# Altium PCB Liq_Power.PcbDoc
Units mil, origin at the board's own origin, x right, y up, seen from the top; angles counter-clockwise.
Board outline 1500 x 3000 mil, 4 copper layers (Top Layer, GND, PWR, Bottom Layer), stack 62.447 mil thick; 28 components, 17 nets, 113 pads, 43 vias.
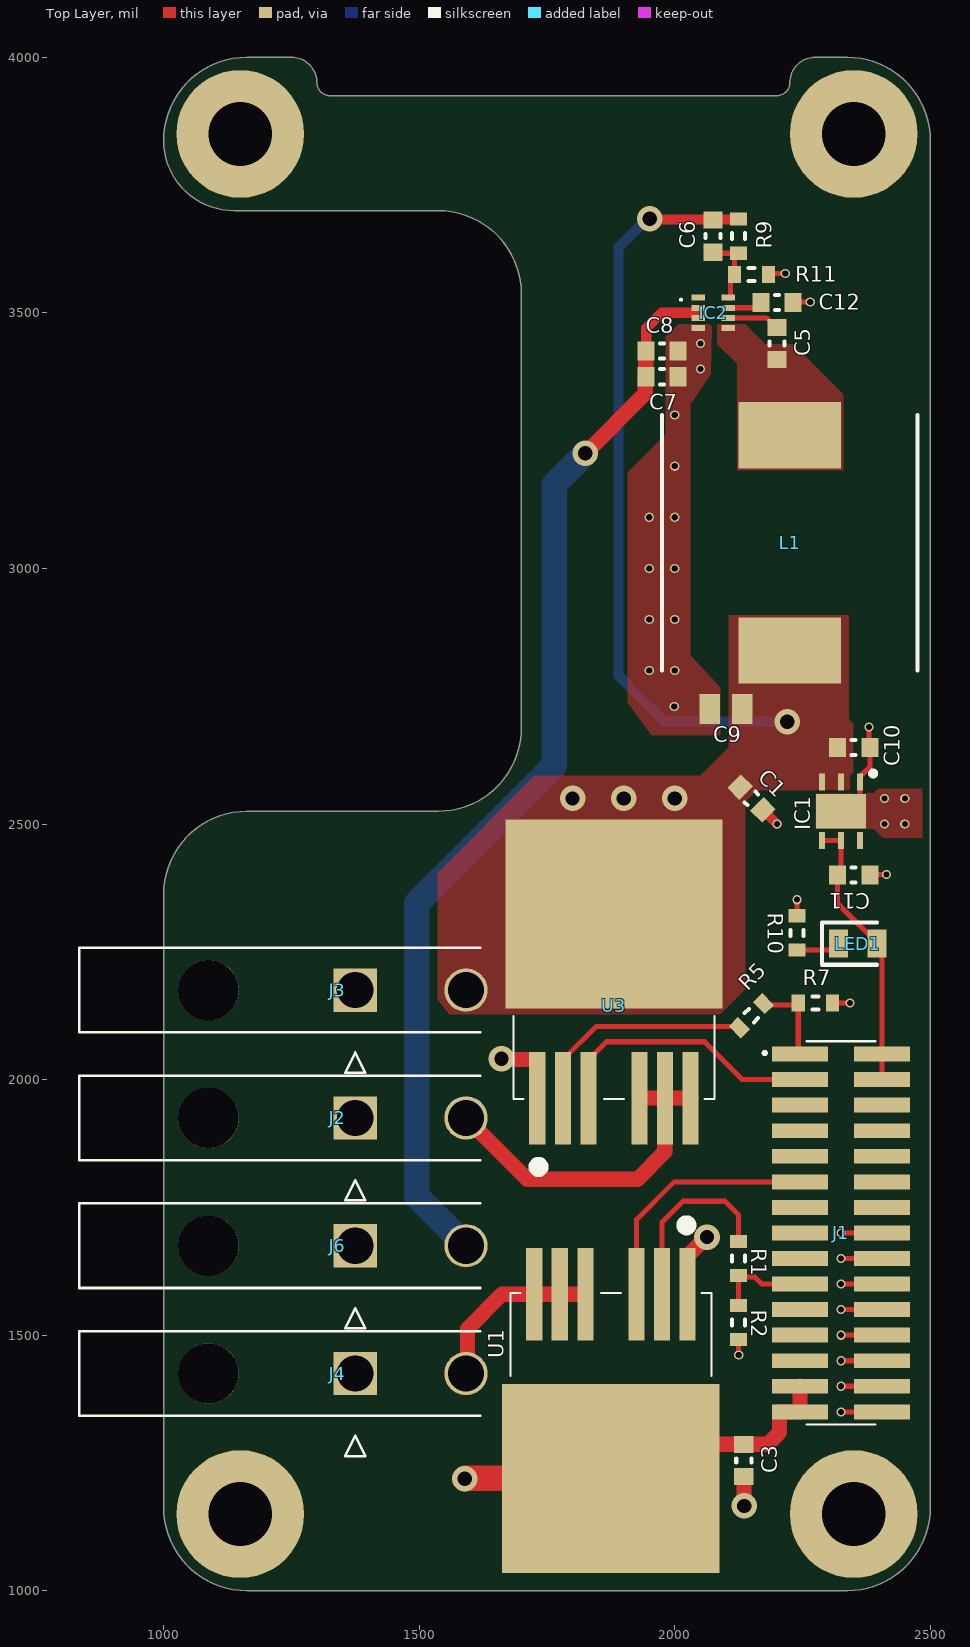
[diagram p0: Top Layer view]
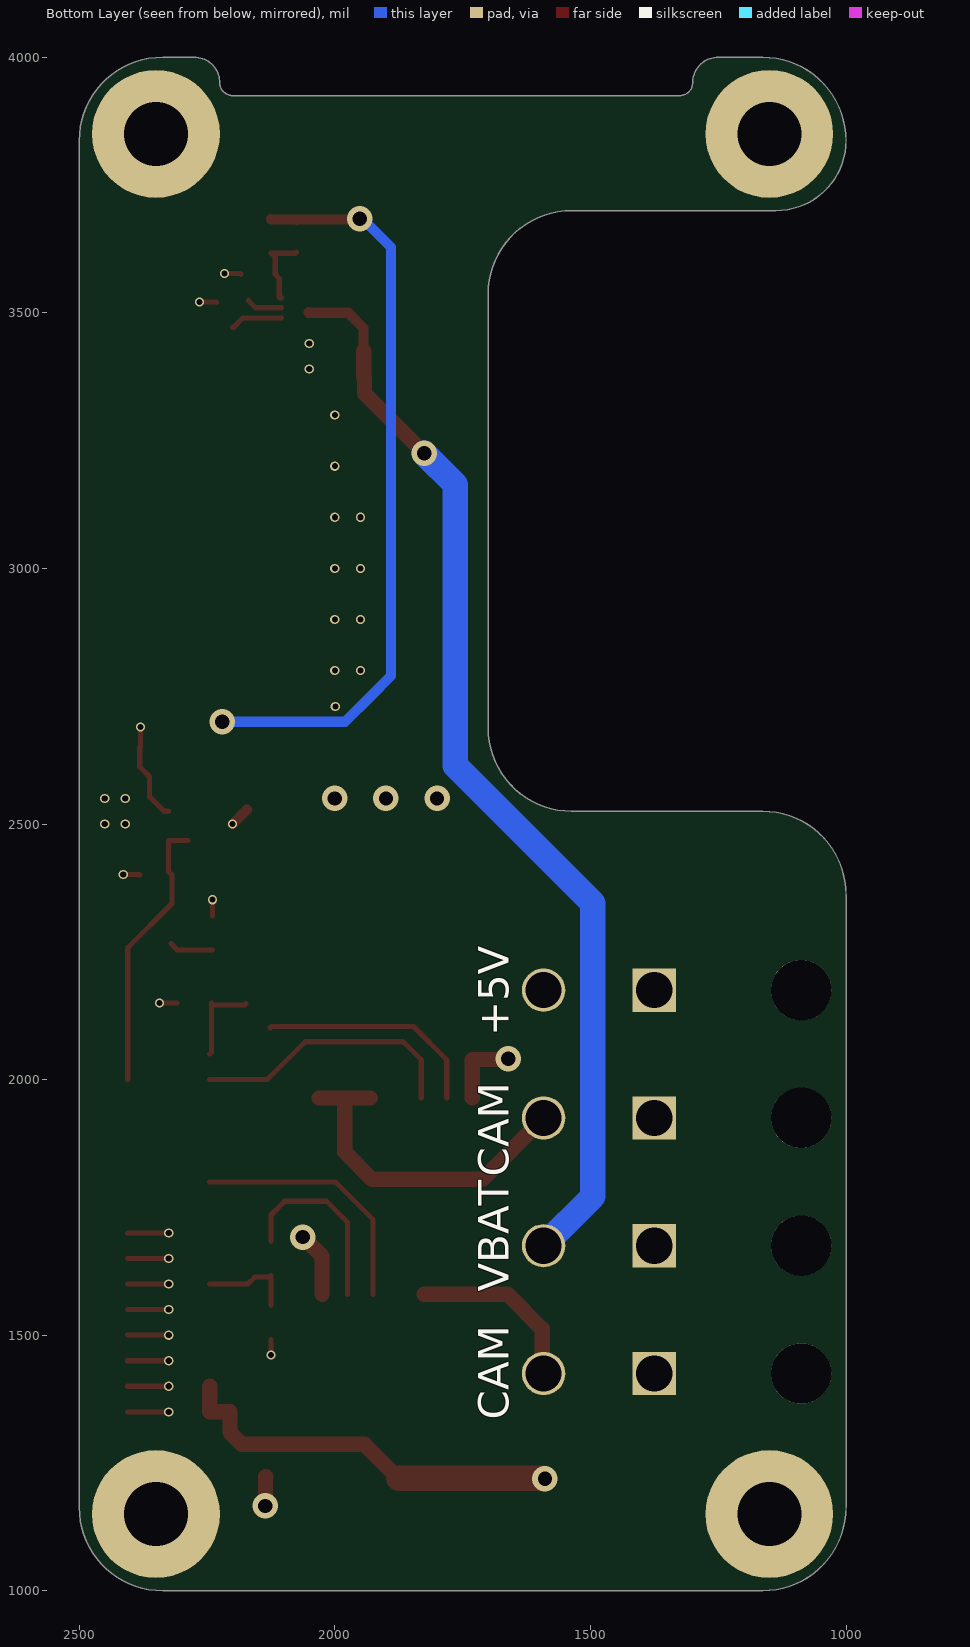
[diagram p1: Bottom Layer view, seen from below]
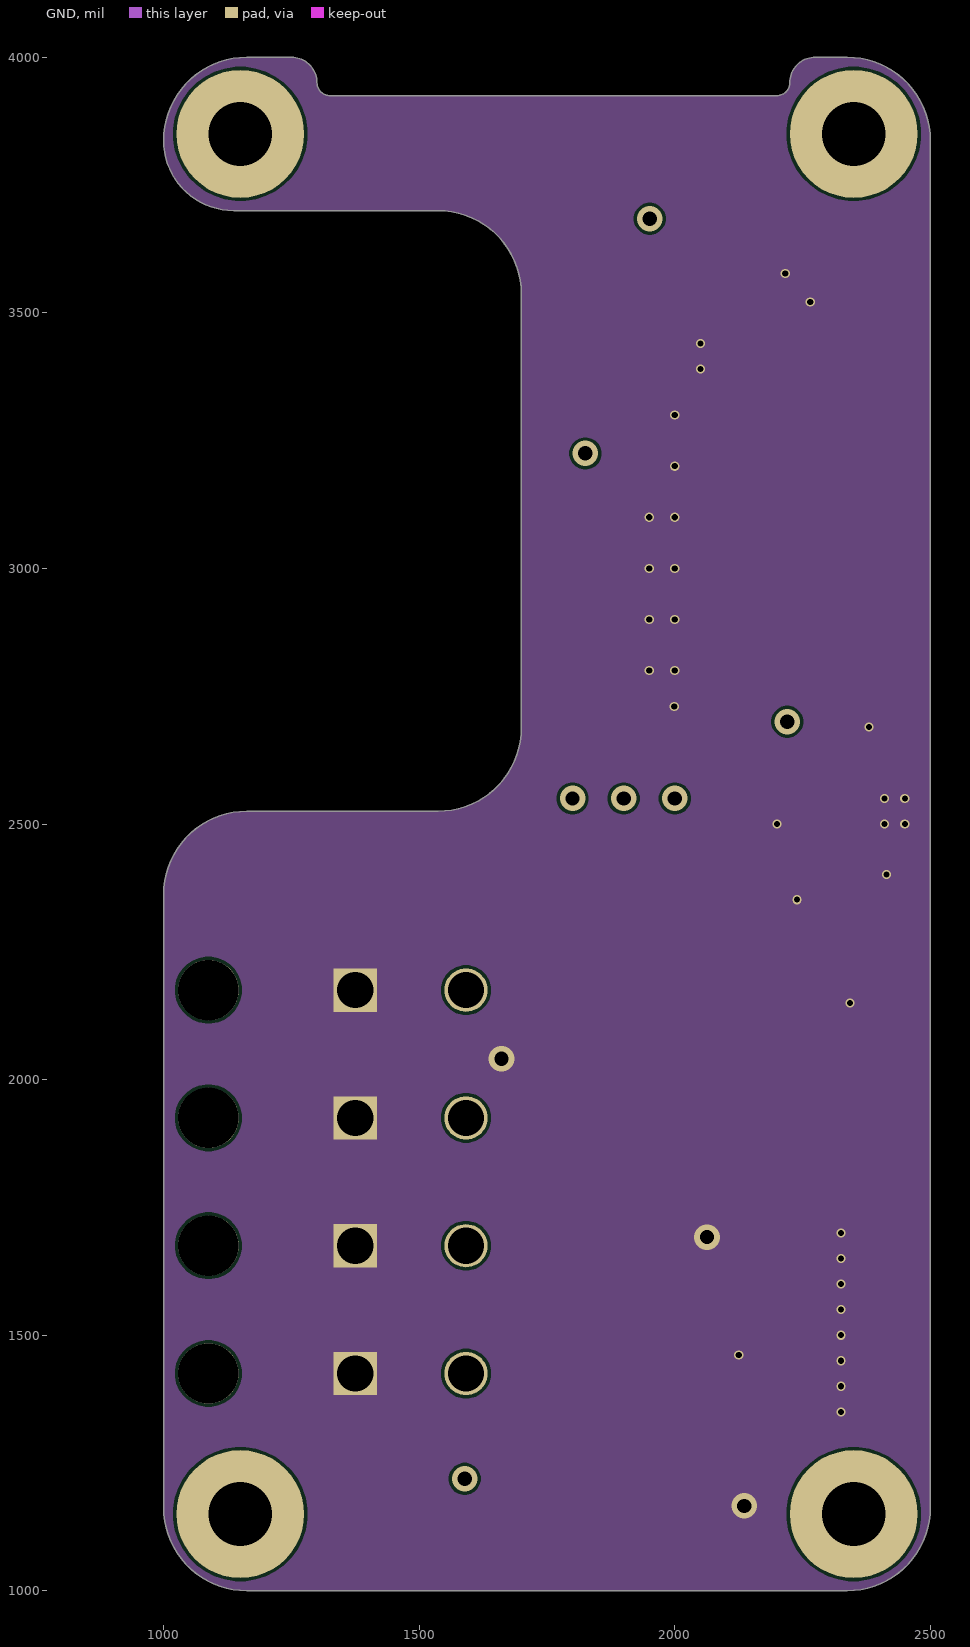
[diagram p2: GND]
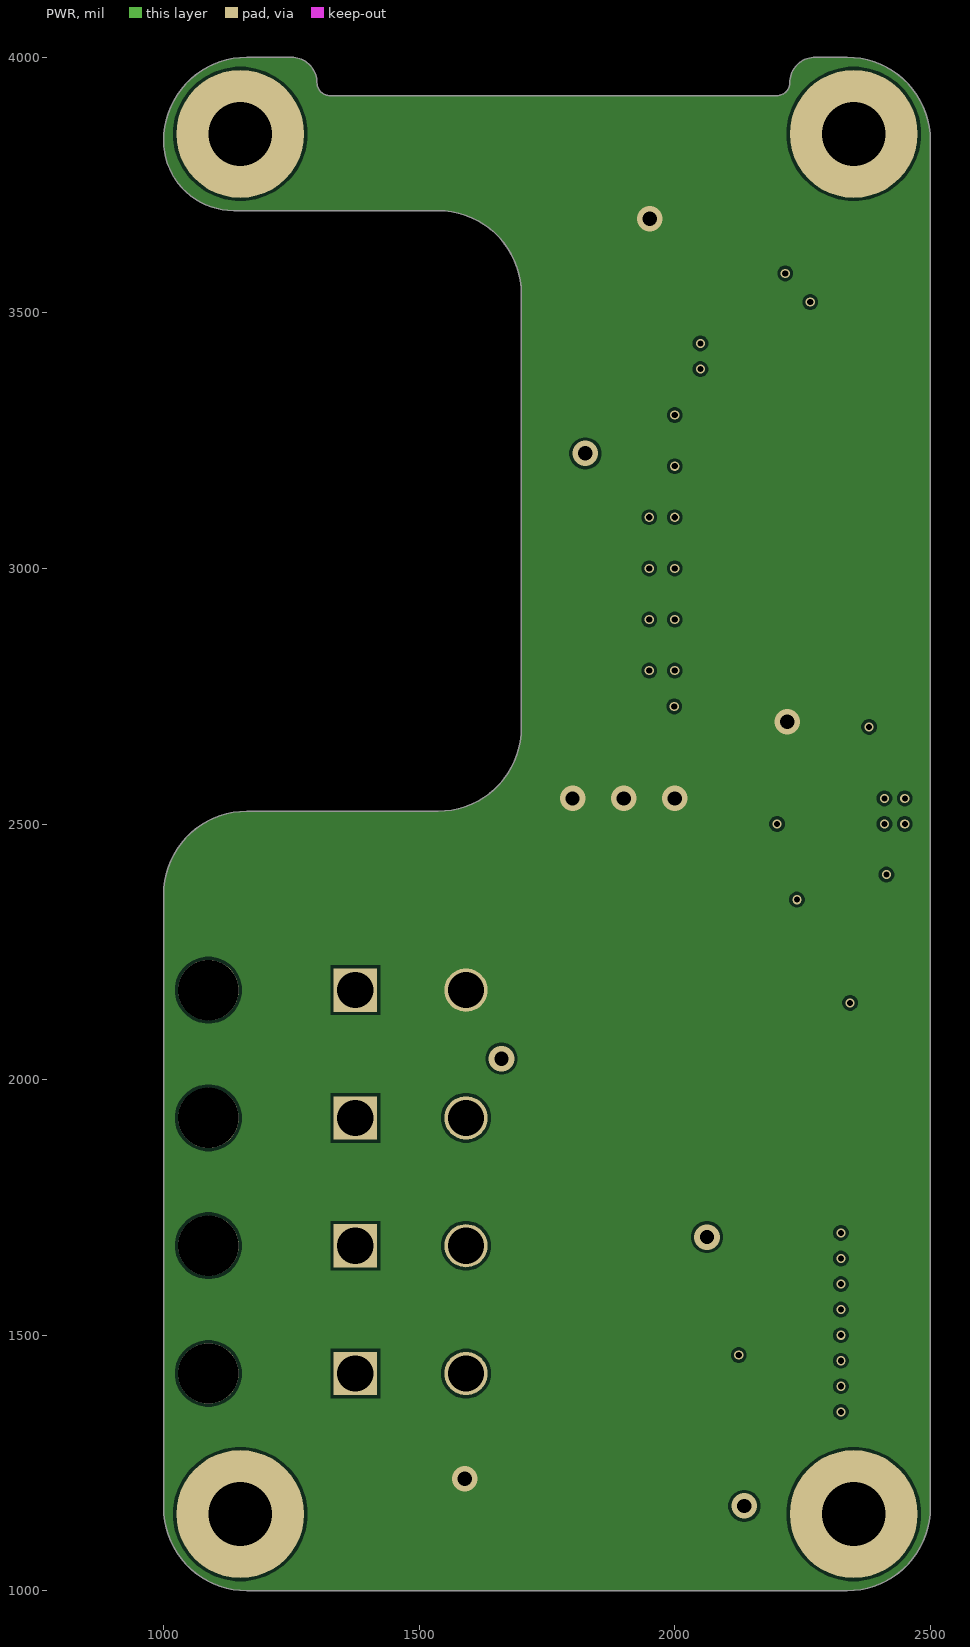
[diagram p3: PWR]
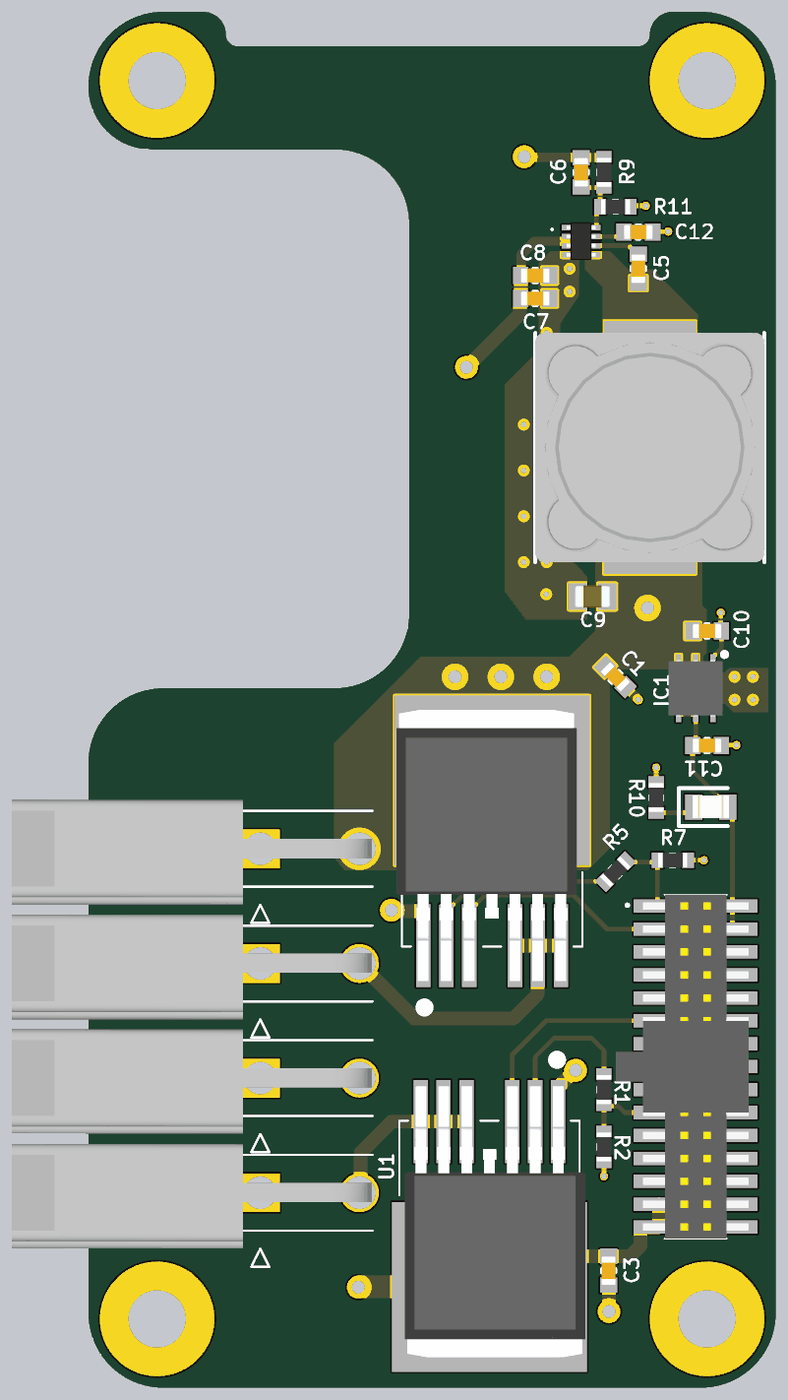
[diagram p4: 3D render of the assembled board from above, using the file's embedded part models]

## Layer stack, top to bottom
Top Solder: solder mask 0.4, Solder Resist, Dk 3.5
Top Layer: signal copper 1.378
Dielectric 2: prepreg 8.283, PP-006, Dk 4.1
GND: signal copper 0.598
Dielectric 1: dielectric 41.929, FR-4, Dk 4.8
PWR: signal copper 0.598
Dielectric 3: prepreg 8.283, PP-006, Dk 4.1
Bottom Layer: signal copper 1.378
Bottom Solder: solder mask 0.4, Solder Resist, Dk 3.5

## Board outline
1163,1000 cw(c1163,1163) 1000,1163 1000,2362 cw(c1163,2362) 1163,2525 1537,2525 ccw(c1537,2688) 1700,2688 1700,3537 ccw(c1537,3537) 1537,3700 1137,3700 cw(c1137,3837) 1000,3837 cw(c1163,3837) 1163,4000 1250,4000 cw(c1250,3950) 1300,3950 ccw(c1325,3950) 1325,3925 2200,3925 ccw(c2200,3950) 2225,3950 cw(c2275,3950) 2275,4000 2337,4000 cw(c2337,3837) 2500,3837 2500,1163 cw(c2337,1163) 2337,1000

## Design rules (kind name [scope] priority, off if disabled: settings)
Clearance [All] p1: gap=6 ignorepadtopadclearanceinfootprint=FALSE
PolygonConnect [All] p1: connectstyle=Direct reliefconductorwidth=10 reliefentries=4 polygonreliefangle="90 Angle" airgapwidth=10
RoutingVias [All] p1: holewidth=12 width=18 viastyle="Through Hole" minholewidth=12 minwidth=18 maxholewidth=28 maxwidth=50
SolderMaskExpansion [All] p1: expansion=4 istentingtop=FALSE
SupplyNets "Schematic Supply Nets" [InNet('VBAT')] p1: voltage=0.000
SupplyNets "Schematic Supply Nets_3" [InNet('VCC')] p2: voltage=0.000
SupplyNets "Schematic Supply Nets_2" [InNet('+5')] p3: voltage=0.000
SupplyNets "Schematic Supply Nets_1" [InNet('GND')] p4: voltage=0.000
Width [All] p1: maxlimit=100 minlimit=6 preferedwidth=10 midlayer2_minwidth=10 bottomlayer_minwidth=10 minimp=50.000000 maximp=50.000000 favimp=50.000000
30 further rules are at their usual default settings.

## Components (designator, comment, footprint, x,y, rotation, side; value= is the part's Value field where it differs from the comment)
C1 "100 nF" CAP_0603 2150,2550 r315 top
C3 "100 nF" CAP_0603 2135,1255 r270 top
C5 "100 nF" CAP_0603 2200,3440 r270 top
C6 "27 nF" CAP_0603 2075,3650 r90 top
C7 "10 uF" CAP_0603 1975,3375 r180 top
C8 "100 nF" CAP_0603 1975,3425 r180 top
C9 "47 uF" CAPC2012X145N 2100,2725 r0 top
C10 "4.7 uF" CAP_0603 2350,2650 r180 top
C11 "4.7 uF" CAP_0603 2350,2400 r180 top
C12 "33 nF" CAP_0603 2200,3520 r180 top
IC1 "LDO40LPU33RY" SON95P300X300X90-7N-D 2325,2525 r270 top
IC2 "TPS62932DRLR" TPS62932DRLR 2075,3500 r0 top
J1 "FTSH-115-01-L-DV-K-P-TR" FTSH-115-XX-YYY-DV-K-P-TR 2325,1700 r270 top
J2 "26-01-3127" 26013127 1375,1925 r270 top
J3 "26-01-3127" 26013127 1375,2175 r270 top
J4 "26-01-3127" 26013127 1375,1425 r270 top
J6 "26-01-3127" 26013127 1375,1675 r270 top
L1 "12 uH" INDPM127127X850N 2225,3050 r270 top
LED1 "White LED" LEDC2012X90N 2358,2266 r0 top
R1 "1KΩ" RES_0603 2125,1650 r90 top
R2 "10KΩ" RES_0603 2125,1525 r90 top
R5 "1KΩ" RES_0603 2150,2125 r225 top
R7 "10KΩ" RES_0603 2275,2150 r180 top
R9 "52.3KΩ" RES_0603 2125,3650 r90 top
R10 "1KΩ" RES_0603 2239,2287 r270 top
R11 "10KΩ" RES_0603 2150,3575 r180 top
U1 "726-BTS500151TADATM2" BTS500151TADATMA2 1875,1400 r180 top
U3 "726-BTS500151TADATM2" BTS500151TADATMA2 1881,2144 r0 top

## Footprints (in the part's own frame and the unit in brackets; to place one, negate y for a bottom-side part, rotate by r counter-clockwise, add the part's x,y. Pads: shape width x height; smd on the part's side, far side on the other; paste and mask are expansions set on the pad)
26013127 [mm]
  rect 2.15x2.15 hole 1.8: 1(0,0)
  round 2.15 hole 1.8: 2(0,5.5)
  round 3 hole 3 unplated: 3(0,-7.3)
  silkscreen extent -2.1,-13.72 4.1,6.22, body extent -2.71,-13.76 3.09,6.17, height 11.4
BTS500151TADATMA2 [mm]
  rect 0.8x4.6 smd: 1(-3.81,-4.575) 2(-2.54,-4.575) 3(-1.27,-4.575) 5(1.27,-4.575) 6(2.54,-4.575) 7(3.81,-4.575)
  rect 10.8x9.4 smd: 4(0,4.575)
  silkscreen extent -5,-8.25 5,-0.5, body extent -5.31,-6.52 4.69,8.47, height 4.4
CAP_0603 [mm] "0603 Generic Capacitor"
  rect 0.85x0.95 smd: 1(-0.8,0) 2(0.8,0)
  silkscreen extent -0.1,-0.38 0.1,0.38, body extent -0.8,-0.4 0.8,0.4, height 0.8
CAPC2012X145N [mm]
  rect 1.02x1.47 smd: 1(-0.81,0) 2(0.81,0)
  body extent -1,-0.63 1,0.63, height 1.45
FTSH-115-XX-YYY-DV-K-P-TR [mm]
  rect 0.74x2.79 smd: 1(-8.89,-2.035) 2(-8.89,2.035) 3(-7.62,-2.035) 4(-7.62,2.035) 5(-6.35,-2.035) 6(-6.35,2.035) 7(-5.08,-2.035) 8(-5.08,2.035) 9(-3.81,-2.035) 10(-3.81,2.035) 11(-2.54,-2.035) 12(-2.54,2.035) 13(-1.27,-2.035) 14(-1.27,2.035) 15(0,-2.035) 16(0,2.035) 17(1.27,-2.035) 18(1.27,2.035) 19(2.54,-2.035) 20(2.54,2.035) 21(3.81,-2.035) 22(3.81,2.035) 23(5.08,-2.035) 24(5.08,2.035) 25(6.35,-2.035) 26(6.35,2.035) 27(7.62,-2.035) 28(7.62,2.035) 29(8.89,-2.035) 30(8.89,2.035)
  silkscreen extent -9.53,-3.83 9.53,1.72, body extent -9.52,-4.44 9.53,2.93, height 6.99
INDPM127127X850N [mm]
  rect 3.3x5.1 smd: 1(-5.35,0) 2(5.35,0)
  silkscreen extent -6.35,-6.35 6.35,6.35, body extent -6.35,-6.35 6.35,6.35, height 8.5
LEDC2012X90N [mm]
  rect 0.95x1.4 smd: 1(-0.95,0) 2(0.95,0)
  silkscreen extent -1.78,-1.05 0.95,1.05, body extent -1,-0.62 1,0.63, height 0.82
RES_0603 [mm] "0603 Generic Resistor"
  rect 0.65x0.85 smd: 1(-0.85,0) 2(0.85,0)
  silkscreen extent -0.15,-0.33 0.15,0.33, body extent -0.8,-0.4 0.8,0.4, height 0.45
SON95P300X300X90-7N-D [mm]
  rect 0.85x0.3 smd: 1(-1.45,0.95) 2(-1.45,0) 3(-1.45,-0.95) 4(1.45,-0.95) 5(1.45,0) 6(1.45,0.95)
  rect 1.7x2.5 smd: 7(0,0)
  silkscreen extent -2,1.48 -1.75,1.73, body extent -1.55,-1.5 1.55,1.5, height 0.9
TPS62932DRLR [mm]
  rect 0.67x0.3 smd: 1(-0.74,0.75) 2(-0.74,0.25) 3(-0.74,-0.25) 4(-0.74,-0.75) 5(0.74,-0.75) 6(0.74,-0.25) 7(0.74,0.25) 8(0.74,0.75)
  silkscreen extent -1.65,0.6 -1.55,0.7, body extent -0.8,-1.05 0.8,1.05, height 0.6

## Part data
C1 C3 C5 C8: library part "100 nF Capacitor, 0603", "Multilayer Ceramic Capacitors MLCC - SMD/SMT KGM15BR71H104JT NEW GLOBAL PN 50V 0.1uF A 581-KGM15BR71H104JT", Manufacturer 1="KYOCERA AVX", Manufacturer Part Number 1=06035C104JAT2A, Package=0603, Supplier Part Number 1=581-06035C104JAT2A, Tolerance=5%, Voltage="50 V", Design Item ID="100 nF Capacitor, 0603", Library Ref=Capacitor_BASE, Supplier 1=Mouser
C6: library part "27 nF Capacitor, 0603", "Multilayer Ceramic Capacitors MLCC - SMD/SMT KGM15BR71H273JT NEW GLOBAL PN 50V 0.027u A 581-KGM15BR71H273JT", Manufacturer 1="KYOCERA AVX", Manufacturer Part Number 1=06035C273JAT2A, MPN=581-06035C273JAT2A, Package=0603, Tolerance=5%, Voltage="50 V", Design Item ID="27 nF Capacitor, 0603", Library Ref=Capacitor_BASE, Supplier 1=Mouser
C7: library part "10 uF Capacitor, 0603", "Multilayer Ceramic Capacitors MLCC - SMD/SMT KGM15BR71H224JT NEW GLOBAL PN 50V 0.22uF A 581-KGM15BR71H224JT", Manufacturer 1="KYOCERA AVX", Manufacturer Part Number 1=06033D106KAT2A, Package=0603, Supplier Part Number 1=581-06033D106KAT2A, Tolerance=10%, Voltage="25 V", Design Item ID="10 uF Capacitor, 0603", Library Ref=Capacitor_BASE, Supplier 1=Mouser
C9: "KGM21AR51A476MU / 20% 10V", Manufacturer_Name="Kyocera AVX", Manufacturer_Part_Number=KGM21AR51A476MU, Mouser Part Number=581-KGM21AR51A476MU, Datasheet Link=https://www.mouser.it/datasheet/2/40/cx5r_KGM-3223198.pdf, Height=1.45mm, Mouser Price/Stock=https://www.mouser.co.uk/ProductDetail/KYOCERA-AVX/KGM21AR51A476MU?qs=Jm2GQyTW%2Fbh2M%2FAPQlqugw%3D%3D
C10 C11: library part "4.7 uF Capacitor, 0603", "Multilayer Ceramic Capacitors MLCC - SMD/SMT KGM15BR71H224JT NEW GLOBAL PN 50V 0.22uF A 581-KGM15BR71H224JT", Manufacturer 1="KYOCERA AVX", Manufacturer Part Number 1=06033D475KAT2A, MPN=581-06033D475KAT2A, Package=0603, Tolerance=10%, Voltage="25 V", Design Item ID="4.7 uF Capacitor, 0603", Library Ref=Capacitor_BASE, Supplier 1=Mouser
C12: library part "33 nF Capacitor, 0603", "Multilayer Ceramic Capacitors MLCC - SMD/SMT KGM15BR71H333JM NEW GLOBAL PN 50V .033uF A 581-KGM15BR71H333JM", Manufacturer 1="KYOCERA AVX", Manufacturer Part Number 1=06035C333JAT4A, Package=0603, Supplier Part Number 1=581-06035C333JAT4A, Tolerance=5%, Voltage="50 V", Design Item ID="33 nF Capacitor, 0603", Library Ref=Capacitor_BASE, Supplier 1=Mouser
IC1: "3.3V 400 mA LDO", Manufacturer_Name=STMicroelectronics, Mouser Part Number=511-LDO40LPU33RY, Arrow Part Number=LDO40LPU33RY, Arrow Price/Stock=https://www.arrow.com/en/products/ldo40lpu33ry/stmicroelectronics?utm_currency=USD&region=europe, Datasheet Link=https://www.st.com/resource/en/datasheet/ldo40l.pdf, Height=0.9mm, Manufacturer_Part_Number=LDO40LPU33RY, Mouser Price/Stock=https://www.mouser.co.uk/ProductDetail/STMicroelectronics/LDO40LPU33RY?qs=qSfuJ%252Bfl%2Fd5qazWclm%2Ffpg%3D%3D, Supplier 1=Mouser, Supplier 2=DigiKey, Supplier Part Number 1=511-LDO40LPU33RY, Supplier Part Number 2=497-18288-1-ND
IC2: "Integrated Circuit", Manufacturer_Name="Texas Instruments", Mouser Part Number=595-TPS62932DRLR, Arrow Part Number=TPS62932DRLR, Arrow Price/Stock=https://www.arrow.com/en/products/tps62932drlr/texas-instruments?utm_currency=USD&region=nac, Datasheet Link=https://www.ti.com/lit/gpn/tps62932, Height=0.6mm, Manufacturer_Part_Number=TPS62932DRLR, Mouser Price/Stock=https://www.mouser.co.uk/ProductDetail/Texas-Instruments/TPS62932DRLR?qs=MyNHzdoqoQL6EE0yynPHsw%3D%3D
J1: "2x15 Board to Board", Manufacturer_Name=SAMTEC, Mouser Part Number=200-FTSH11501LDVKPTR, Arrow Part Number=FTSH-115-01-L-DV-K-P-TR, Arrow Price/Stock=https://www.arrow.com/en/products/ftsh-115-01-l-dv-k-p-tr/samtec, Datasheet Link=http://suddendocs.samtec.com/prints/ftsh-1xx-xx-xxx-dv-xxx-xxx-mkt.pdf, Manufacturer_Part_Number=FTSH-115-01-L-DV-K-P-TR, Mouser Price/Stock=https://www.mouser.co.uk/ProductDetail/Samtec/FTSH-115-01-L-DV-K-P-TR?qs=%252BZP6%2F%252BtExtA4afaEWbpOPw%3D%3D
J2 J3 J4 J6: "Connector", Manufacturer_Name=Molex, Mouser Part Number=538-26-01-3127, Datasheet Link=https://www.molex.com/pdm_docs/sd/026013108_sd.pdf, Height=10mm, Manufacturer_Part_Number=26-01-3127, Mouser Price/Stock=https://www.mouser.co.uk/ProductDetail/Molex/26-01-3127?qs=ZhwKFWhxrSFuwrwfqZt8Sg%3D%3D
L1: "SRR1208-120ML / 25 mOhm 20%", Arrow Part Number=SRR1208-120ML, Manufacturer_Name=Bourns, Mouser Part Number=652-SRR1208-120ML, Arrow Price/Stock=https://www.arrow.com/en/products/srr1208-120ml/bourns?utm_currency=USD&region=nac, Datasheet Link=https://componentsearchengine.com/Datasheets/2/SRR1208-120ML.pdf, Height=8.5mm, Manufacturer_Part_Number=SRR1208-120ML, Mouser Price/Stock=https://www.mouser.co.uk/ProductDetail/Bourns/SRR1208-120ML?qs=EMXTcfAPUUWkaFmzdAAv1A%3D%3D
LED1: "LED", Manufacturer_Name="Avago Technologies", Manufacturer_Part_Number=HSMW-C170-U0000, MPN=630-HSMW-C170-U0000, Datasheet Link=https://componentsearchengine.com/Datasheets/2/HSMW-C170-U0000.pdf, Height=0.9mm, Mouser Price/Stock=https://www.mouser.co.uk/ProductDetail/Broadcom-Avago/HSMW-C170-U0000?qs=tMOYG%252Bw4%252BLwGyeHODzQdug%3D%3D, Supplier 1=Mouser, Supplier Part Number 1=630-HSMW-C170-U0000
R1 R5: library part "1 KOhm Resistor", "Thick Film Resistors - SMD General Purpose Chip Resistor 0603, 1kOhms, 1%, 1/10W", Manufacturer 1=YAGEO, Manufacturer Part Number 1=RC0603FR-071KL, Package=0603, Power=0.1W, Supplier Part Number 1=603-RC0603FR-071KL, Tolerance=0.01, Design Item ID="1 KOhm Resistor", Library Ref=Resistor_BASE, Supplier 1=Mouser
R2 R7 R11: library part "10 KOhm Resistor", "Thick Film Resistors - SMD General Purpose Chip Resistor 0603, 10kOhms, 1%, 1/10W", Manufacturer 1=YAGEO, Manufacturer Part Number 1=RC0603FR-0710KL, Package=0603, Power=0.1W, Supplier Part Number 1=603-RC0603FR-0710KL, Tolerance=0.01, Design Item ID="10 KOhm Resistor", Library Ref=Resistor_BASE, Supplier 1=Mouser
R9: library part "52.3 KOhm Resistor", "Thick Film Resistors - SMD General Purpose Chip Resistor 0603, 52.3kOhms, 1%, 1/10W", Manufacturer 1=YAGEO, Manufacturer Part Number 1=RC0603FR-0752K3L, MPN=603-RC0603FR-0752K3L, Package=0603, Power=0.1W, Tolerance=0.01, Design Item ID="52.3 KOhm Resistor", Library Ref=Resistor_BASE, Supplier 1=Mouser
R10: library part "1 KOhm Resistor", "Thick Film Resistors - SMD General Purpose Chip Resistor 0603, 1kOhms, 1%, 1/10W", Manufacturer 1=YAGEO, Manufacturer Part Number 1=RC0603FR-071KL, MPN=603-RC0603FR-071KL, Package=0603, Power=0.1W, Tolerance=0.01, Design Item ID="1 KOhm Resistor", Library Ref=Resistor_BASE, Supplier 1=Mouser
U1 U3: library part BTS500151TADATMA2, "High-Side Switch 33 A", Manufacturer="Infineon Technologies", Datasheet=https://www.mouser.com/datasheet/3/70/1/Infineon_BTS50015_1TAD_DS_v01_02_EN.pdf, Manufacturer Part Number=BTS500151TADATMA2, Supplier 1=Mouser, Supplier Part Number 1=726-BTS500151TADATM2

## Free pads (board coordinates)
  round 250 hole 125: 22(1150,1150) 22(1150,3850) 22(2350,1150) 22(2350,3850)

## Via types
v1: diameter 18, hole 12, Top Layer to Bottom Layer, 33 vias
v2: diameter 50, hole 28, Top Layer to Bottom Layer, 10 vias

## Nets (pads, with @x,y where several pads share a name; then routed paths per layer and width w, separated by ;. In a path a pad name is that pad's centre, name@x,y a point inside that pad or via, vN(x,y) a via of type N, cw(c..) or ccw(c..) an arc to the next point about the centre after c; other vN are vias at no path point)
+5: C1.1 C3.1 C6.2 C9.2 C10.2 IC1.2 IC1.3 J1.27 J1.29 J3.2 L1.2 R9.2 U1.4 U3.4 | length 2248.6
  Top Layer w20: v2(1951,3684) 1952.25,3682.75 2073.75,3682.75 C6.2 2075.98,3682.48 2124.02,3682.48 R9.2
  Top Layer w30: U1.4 1941.61,1286.5 C3.1 2181.38,1286.5 2204.96,1310.08 2204.96,1349.57 2205.39,1350 J1.29 J1.27
  Top Layer w50: v2(1589,1219) 1589.88,1219.88 U1.4
  Bottom Layer w20: v2(1951,3684) 1945.92,3684 1890,3628.08 1890,2790 1930,2750 1980,2700 v2(2220,2700)
  other v2: 1800,2550 1900,2550 2000,2550
BST: C5.1 IC2.6 | length 103.6
  Top Layer w10: IC2.6 2179.37,3490.16 2198.03,3471.5 C5.1
Camera2_In: J1.19 R1.1 R2.2 | length 184.8
  Top Layer w10: R2.2 R1.1 2128.05,1613.48 2156.73,1613.48 2170.22,1600 J1.19
Camera2_IS: J1.11 U1.3 | length 496.4
  Top Layer w10: U1.3 1925,1726 1999,1800 J1.11
Camera2_Out: J4.2 U1.5 U1.6 U1.7 | length 347.2
  Top Layer w30: J4.2 1594.32,1427.79 1594.32,1512.32 1662.12,1580.12 U1.7 U1.6 U1.5
Camera_In: J1.1 R5.1 R7.2 | length 172.1
  Top Layer w10: R5.1 2176.45,2145.88 2237.41,2145.88 R7.2 2241.54,2053.35 J1.1
Camera_IS: J1.3 U3.3 | length 534
  Top Layer w10: U3.3 1831,2038.68 1866.32,2074 2058,2074 2132,2000 J1.3
Camera_Out: J2.2 U3.5 U3.6 U3.7 | length 666.4
  Top Layer w30: J2.2 1711.54,1805 1927,1805 1980.25,1858.25 1980.25,1963.13 U3.6 ; U3.5 U3.6 ; U3.7 U3.6
FB: C6.1 IC2.8 R9.1 R11.2 | length 149
  Top Layer w10: C6.1 2076.97,3616.54 R9.1 2124.33,3616.54 2116.54,3608.74 R11.2 2108.74,3567.2 2108.74,3530.43 2107.83,3529.53 IC2.8
GND: C1.2 C3.2 C7.1 C8.1 C9.1 C10.1 C11.1 C12.1 IC1.1 IC1.7 IC2.4 J1.16 J1.18 J1.20 J1.22 J1.24 J1.26 J1.28 J1.30 J2.1 J3.1 J4.1 J6.1 R2.1 R7.1 R10.1 R11.1 U1.1 U3.1 | length 1403.1
  Top Layer w10: v1(2125,1461) R2.1 ; R11.1 2185.46,3577 v1(2216,3577) ; C12.1 2232.5,3521 v1(2265,3521) ; R10.1 v1(2239,2352) ; R7.1 v1(2343,2150) ; v1(2325,1350) J1.30 ; v1(2325,1400) J1.28 ; v1(2325,1450) J1.26 ; v1(2325,1500) J1.24 ; v1(2325,1550) J1.22 ; v1(2325,1600) J1.20 ; v1(2325,1650) J1.18 ; v1(2325,1700) J1.16 ; IC1.7 2333.94,2525 2362.4,2553.46 IC1.1 2362.4,2592.91 2381.5,2612.01 C10.1 2380,2651.5 v1(2380,2690) ; C11.1 2382.5,2401 v1(2414,2401)
  Top Layer w20: C1.2 v1(2200,2500)
  Top Layer w30: v2(1661,2041) 1662.57,2039.43 1730.25,2039.43 1731,2038.68 U3.1 ; U1.1 2025,1654.92 2062.08,1692 v2(2063,1692) ; C3.2 2135.5,1223 2135.5,1166.5 v2(2136,1166)
  other v1: 2410,2500 2450,2500 2410,2550 2450,2550 1999,2730 1950,2800 2000,2800 1950,2900 2000,2900 1950,3000 2000,3000 1950,3100 2000,3100 2000,3200 2000,3300 2050,3390 2050,3440
NetLED1_1: LED1.1 R10.2 | length 86.8
  Top Layer w10: R10.2 2308.13,2253.54 LED1.1
NetR1_2: R1.2 U1.2 | length 370.6
  Top Layer w10: U1.2 1975,1721 2016,1762 2098,1762 2125,1735 R1.2
NetR5_2: R5.2 U3.2 | length 448.4
  Top Layer w10: U3.2 1781,2038.68 1846.32,2104 1873,2104 1873.12,2104.12 2123.55,2104.12 R5.2
SS: C12.2 IC2.7 | length 71.8
  Top Layer w10: IC2.7 2155.32,3509.84 2168.5,3523.03 C12.2@2168.5,3525
SW: C5.2 IC2.5 L1.1
VBAT: C7.2 C8.2 IC2.2 IC2.3 J6.2 | length 2140.8
  Top Layer w20: C8.2 1944,3425.5 1944,3470 1974,3500 2050,3500 2051,3501
  Top Layer w30: v2(1825,3225) 1942,3342 1942,3373.5 C7.2 C8.2
  Bottom Layer w50: J6.2 1495,1771.54 1495,2345 1764,2614 1764,3164 v2(1825,3225)
VCC: C11.2 IC1.4 IC1.5 J1.2 J1.4 LED1.2 | length 543.9
  Top Layer w10: IC1.4 IC1.5 2325,2406.5 C11.2 2318.5,2344.5 2405.12,2257.88 J1.2 J1.4
pads on no net: IC1.6 IC2.1 J1.5 J1.6 J1.7 J1.8 J1.9 J1.10 J1.12 J1.13 J1.14 J1.15 J1.17 J1.21 J1.23 J1.25 J2.3 J3.3 J4.3 J6.3

## Polygon pours and split planes (outlines as drawn)
+5 on Top Layer "NONET_L-01_P-001" (solid, pour order 6): 2340,2908 2340,2705 2349,2696 2349,2601 2342,2594 2342,2567 2274,2567 2273,2566 2160,2566 2138,2544 2138,2177 2089,2128 1559,2128 1536,2156 1536,2163 1536,2405 1725,2594 2050,2594 2106,2650 2106,2908
GND on Top Layer "NONET_L-01_P-001" (solid, pour order 7): 2276,2560 2389,2560 2398,2569 2484,2569 2484,2473 2407,2473 2389,2491 2277,2491 2276,2492
SW on Top Layer "NONET_L-01_P-001" (solid, pour order 5): 2083,3478 2138,3478 2177,3439 2232,3439 2330,3341 2330,3192 2122,3192 2122,3400 2083,3439
GND on Top Layer "NONET_L-01_P-001" (solid, pour order 4): 2070,3380 2030,3320 2030,2830 2089,2768 2089,2674 1955,2674 1908,2737 1908,2763 1908,3188 1982,3262 1982,3453 2007,3478 2072,3478
GND on GND "GND" (solid, pour order 8): 1163,1000 cw(c1163,1163) 1000,1163 1000,2362 cw(c1163,2362) 1163,2525 1537,2525 ccw(c1537,2688) 1700,2688 1700,3537 ccw(c1537,3537) 1537,3700 1137,3700 cw(c1137,3837) 1000,3837 cw(c1163,3837) 1163,4000 1250,4000 cw(c1250,3950) 1300,3950 ccw(c1325,3950) 1325,3925 2200,3925 ccw(c2200,3950) 2225,3950 cw(c2275,3950) 2275,4000 2337,4000 cw(c2337,3837) 2500,3837 2500,1163 cw(c2337,1163) 2337,1000
+5 on PWR "+5" (solid, pour order 9): 1163,1000 cw(c1163,1163) 1000,1163 1000,2362 cw(c1163,2362) 1163,2525 1537,2525 ccw(c1537,2688) 1700,2688 1700,3537 ccw(c1537,3537) 1537,3700 1137,3700 cw(c1137,3837) 1000,3837 cw(c1163,3837) 1163,4000 1250,4000 cw(c1250,3950) 1300,3950 ccw(c1325,3950) 1325,3925 2200,3925 ccw(c2200,3950) 2225,3950 cw(c2275,3950) 2275,4000 2337,4000 cw(c2337,3837) 2500,3837 2500,1163 cw(c2337,1163) 2337,1000

## Silkscreen, mask and mechanical layers (free items; w line width, h text height)
Bottom Overlay:
  text "+5V" at 1660,2085 h60 r270
  text "CAM" at 1660,1810 h60 r270
  text "VBAT" at 1660,1585 h60 r270
  text "CAM" at 1660,1335 h60 r270
Mechanical 1:
  lines w10: 1000,1163 ccw(c1163,1163) 1163,1000 1600,1000 2337,1000 ccw(c2337,1163) 2500,1163 2500,3837 ccw(c2337,3837) 2337,4000 2325,4000 2275,4000 ccw(c2275,3950) 2225,3950 cw(c2200,3950) 2200,3925 1325,3925 cw(c1325,3950) 1300,3950 ccw(c1250,3950) 1250,4000 1163,4000 ccw(c1163,3837) 1000,3837 ccw(c1137,3837) 1137,3700 1537,3700 cw(c1537,3537) 1700,3537 1700,2763 1700,2688 cw(c1537,2688) 1537,2525 1163,2525 ccw(c1163,2362) 1000,2362 1000,1163